# Altium PCB Signal Generator_PCB.PcbDoc
Units mm, origin at the board's own origin, x right, y up, seen from the top; angles counter-clockwise.
Board outline 152.4 x 101.6 mm, 2 copper layers (Top Layer, Bottom Layer); 53 components, 53 nets, 222 pads, 9 vias.
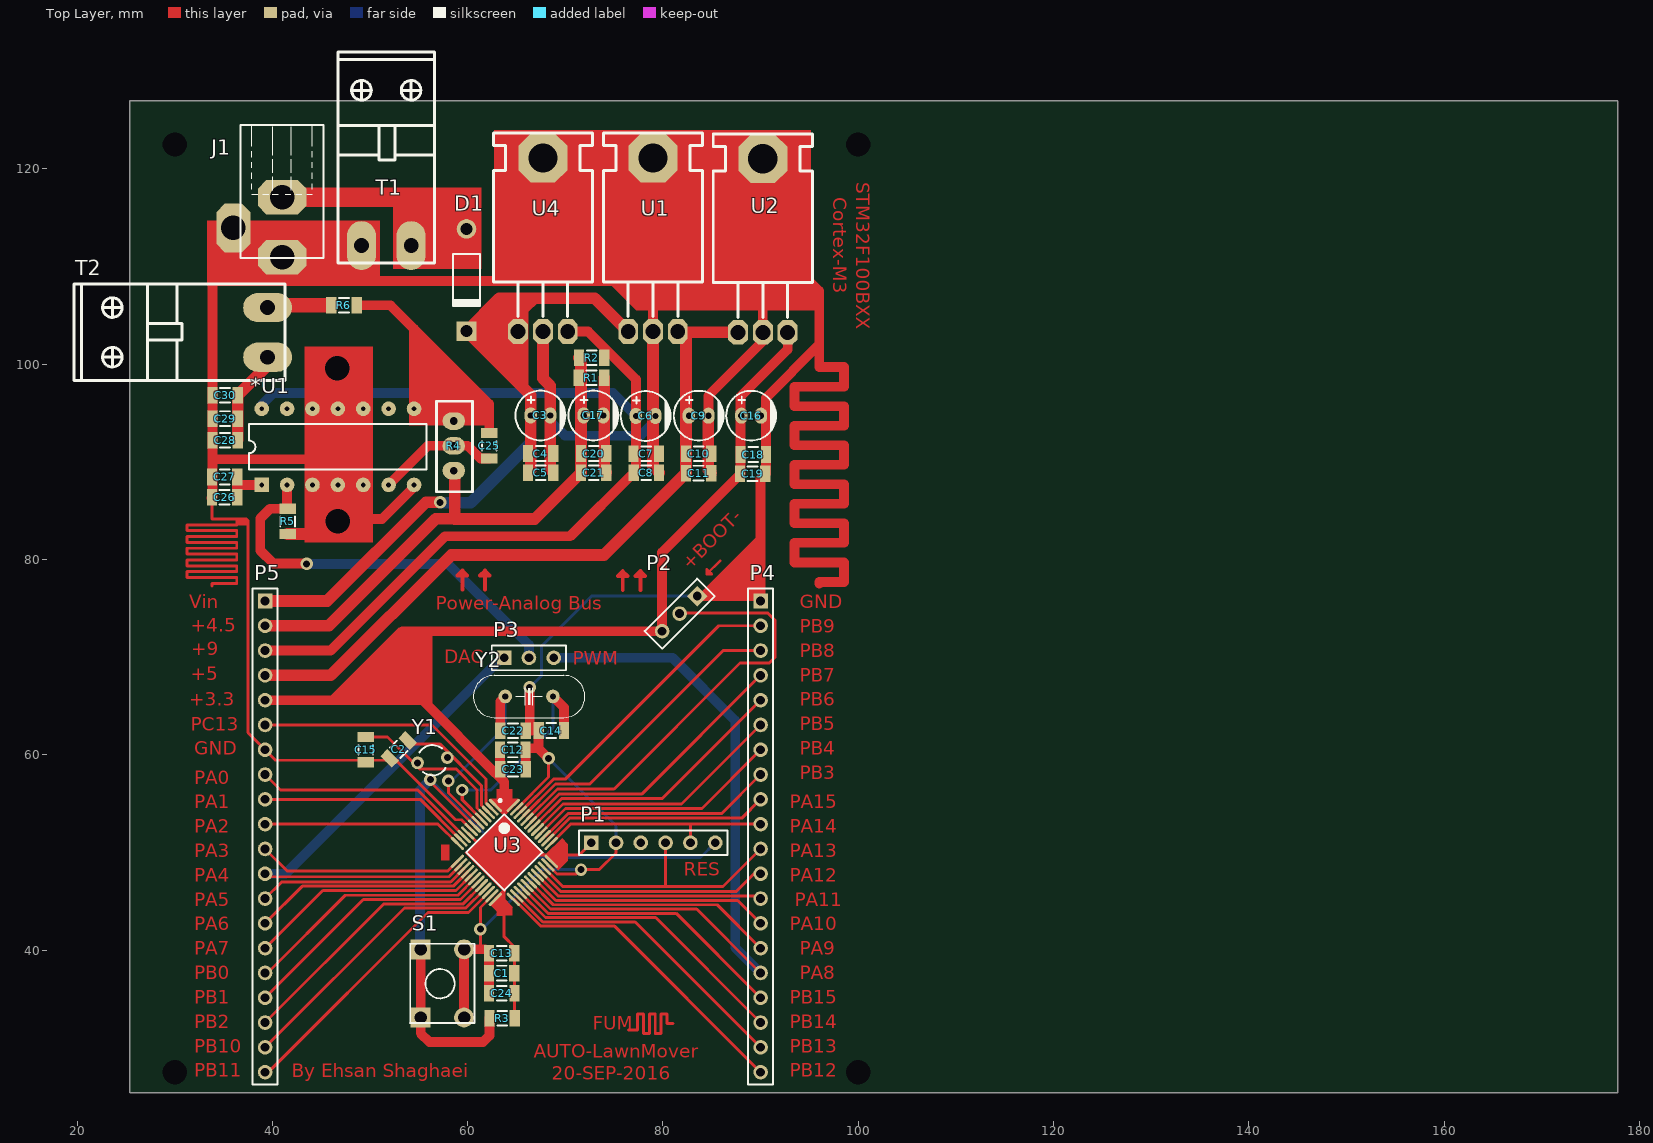
[diagram p0: Top Layer view]
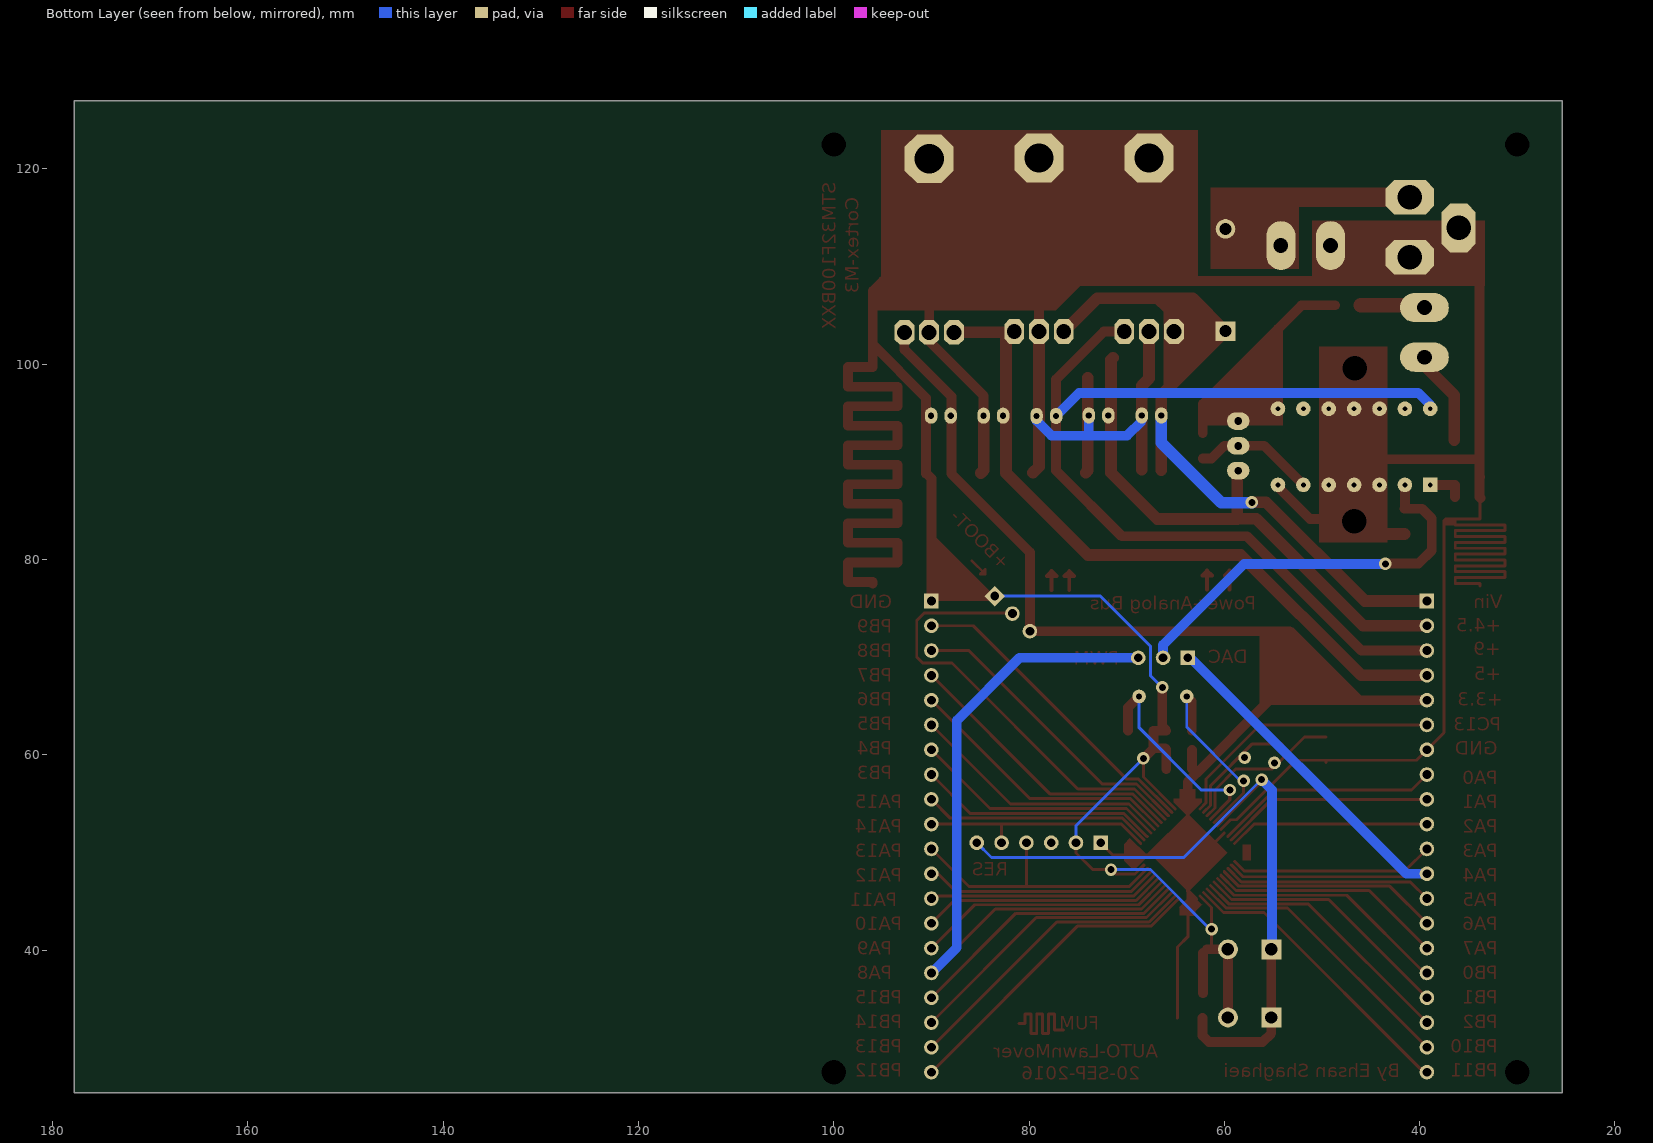
[diagram p1: Bottom Layer view, seen from below]
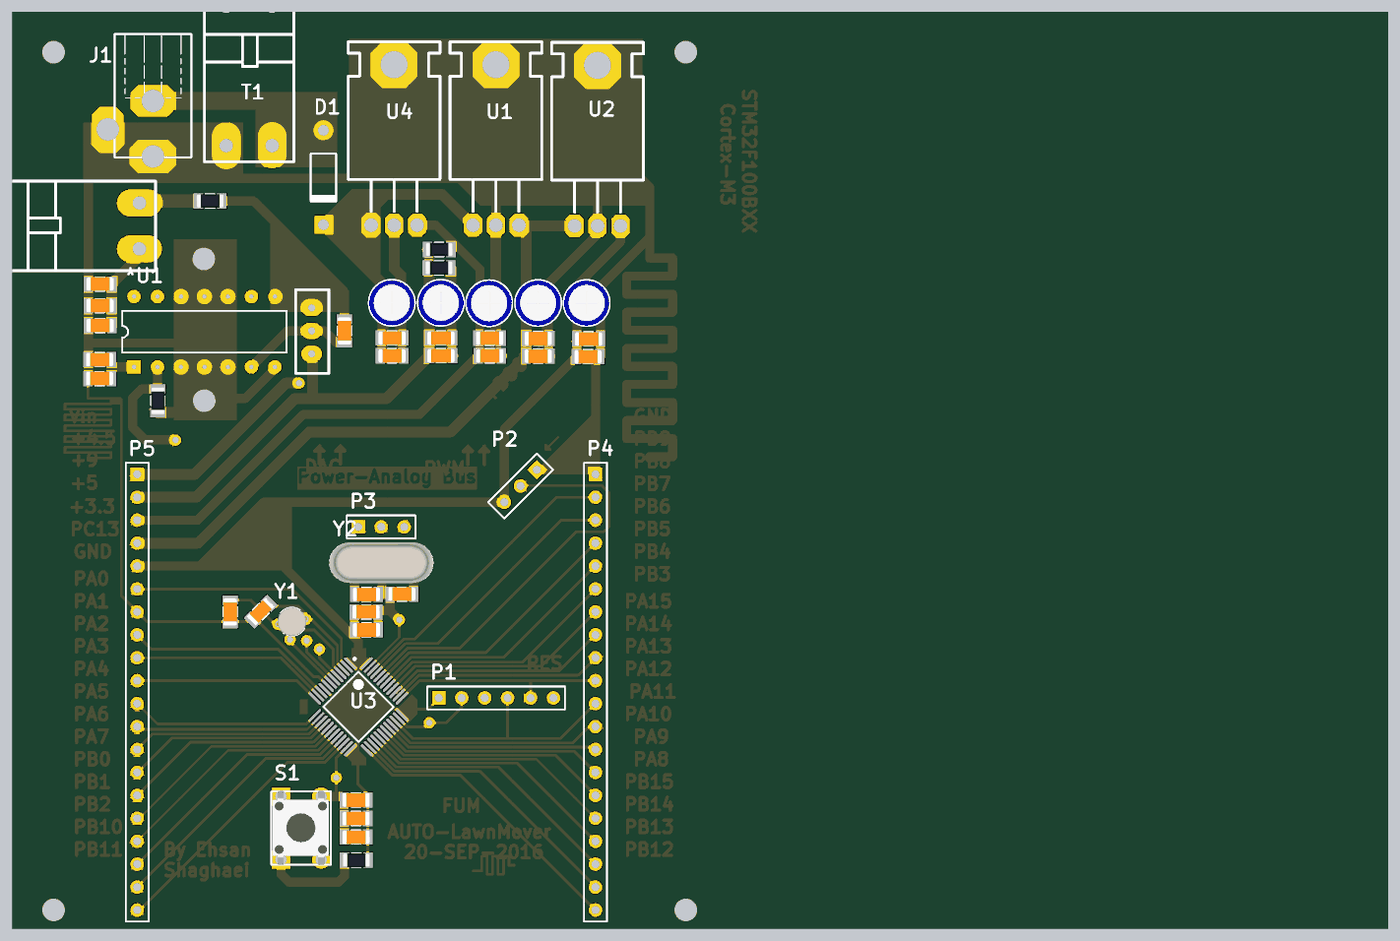
[diagram p2: 3D render of the assembled board from above, using the file's embedded part models]

## Layer stack, top to bottom
Top Solder: solder mask 0.0102, Solder Resist, Dk 3.5
Top Layer: signal copper 0.0356
Dielectric 1: dielectric 0.32, FR-4, Dk 4.8
Bottom Layer: signal copper 0.0356
Bottom Solder: solder mask 0.0102, Solder Resist, Dk 3.5

## Board outline
25.4,25.4 177.8,25.4 177.8,127 25.4,127

## Design rules (kind name [scope] priority, off if disabled: settings)
Clearance [All] p1: gap=0.14
PolygonConnect [All] p1: connectstyle=Relief reliefconductorwidth=0.254 reliefentries=4 polygonreliefangle="90 Angle" airgapwidth=0.254
RoutingVias [All] p1: holewidth=0.711 width=1.27 viastyle="Through Hole" minholewidth=0.711 minwidth=1.27 maxholewidth=0.711 maxwidth=1.27
SolderMaskExpansion [All] p1: expansion=0.102
Width [All] p1: maxlimit=2 minlimit=0.2 preferedwidth=0.5 checkconnectedcopper=TRUE
30 further rules are at their usual default settings.

## Components (designator, comment, footprint, x,y, rotation, side; value= is the part's Value field where it differs from the comment)
*U1 "*AMP" LM380N-DIP 38.9,87.638 r90 top
C1 "10uf" SMD_CAP_1206 62.181,37.636 r0 top
C2 "10pF" SMD_CAP_1206 53.848,61.468 r225 top
C3 "470U" "cap 01" 67.45,94.75 r180 top
C4 "100nF" SMD_CAP_1206 66.175,90.85 r0 top
C5 "10Uf" SMD_CAP_1206 66.175,88.875 r0 top
C6 "470U" "cap 01" 78.225,94.7 r180 top
C7 "100nF" SMD_CAP_1206 76.985,90.839 r0 top
C8 "10Uf" SMD_CAP_1206 77,88.875 r0 top
C9 "470U" "cap 01" 83.65,94.725 r180 top
C10 "100nF" SMD_CAP_1206 82.351,90.814 r0 top
C11 "10Uf" SMD_CAP_1206 82.35,88.85 r0 top
C12 "10Uf" SMD_CAP_1206 65.906,60.491 r180 top
C13 "100nF" SMD_CAP_1206 62.181,39.681 r0 top
C14 "20pF" SMD_CAP_1206 69.867,62.48 r180 top
C15 "10pF" SMD_CAP_1206 49.562,61.815 r270 top
C16 "470U" "cap 01" 89.025,94.725 r180 top
C17 "470U" "cap 01" 72.875,94.75 r180 top
C18 "100nF" SMD_CAP_1206 87.95,90.75 r0 top
C19 "10Uf" SMD_CAP_1206 87.875,88.775 r0 top
C20 "100nF" SMD_CAP_1206 71.604,90.85 r0 top
C21 "10Uf" SMD_CAP_1206 71.602,88.886 r0 top
C22 "20pF" SMD_CAP_1206 63.345,62.467 r0 top
C23 "100nF" SMD_CAP_1206 65.938,58.524 r180 top
C24 "10Uf" SMD_CAP_1206 62.189,35.573 r0 top
C25 "100nF" SMD_CAP_1206 62.2,90.35 r90 top
C26 "10Uf" SMD_CAP_1206 36.399,86.357 r180 top
C27 "100nF" SMD_CAP_1206 36.402,88.45 r180 top
C28 "100Uf" SMD_CAP_1206 36.45,92.225 r180 top
C29 "100nF" SMD_CAP_1206 36.447,94.428 r180 top
C30 "10Uf" SMD_CAP_1206 36.45,96.825 r180 top
D1 "Diode 1N4007" DO-41 59.875,108.625 r270 top
J1 "DC_Jack" My_DC_Jack 41,119.525 r180 top
P1 "ProgrammerSocket" HDR1X6 72.649,50.986 r0 top
P2 "Jumper" HDR1X3 83.5,76.25 r225 top
P3 "JUMPER" HDR1X3 63.733,69.925 r0 top
P4 "Header 20" HDR1X20 90,75.75 r270 top
P5 "Header 20" HDR1X20 39.25,75.75 r270 top
R1 "1K" "RES 1206 (3216X08L)" 73.975,98.625 r180 top
R2 "1K" "RES 1206 (3216X08L)" 71.4,100.65 r0 top
R3 "10K" "RES 1206 (3216X08L)" 62.225,33.025 r0 top
R4 "POT" MOL_1 58.575,94.175 r270 top
R5 "1K" "RES 1206 (3216X08L)" 41.55,82.6 r90 top
R6 "VAR" "RES 1206 (3216X08L)" 48.625,106.025 r180 top
S1 "Switch PB" "Switch - Push to On" 57.404,36.576 r90 top
T1 "PHONIX2" PHONIX2 54.2,112.15 r0 top
T2 "ANT" PHONIX2 39.5,105.8 r90 top
U1 "7805" My_TO-220 76.45,103.35 r0 top
U2 "lf33" My_TO-220 87.7,103.275 r0 top
U3 "STM32F100C8T6B" STM-LQFP48_N 63.75,50 r315 top
U4 "7809" My_TO-220 65.175,103.35 r0 top
Y1 "32khz" "XTAL RTC" 56.388,59.436 r100 top
Y2 "8 - 12 Mhz" "XTAL Small" 66.285,65.967 r0 top

## Footprints (in the part's own frame and the unit in brackets; to place one, negate y for a bottom-side part, rotate by r counter-clockwise, add the part's x,y. Pads: shape width x height; smd on the part's side, far side on the other; paste and mask are expansions set on the pad)
"cap 01" [mm]
  oval 1.27x1.651 hole 0.635: 1(1,0) 2(-1,0)
  silkscreen extent -2.55,-2.55 2.55,2.55, body extent -2.53,-2.53 2.53,2.53, height 12.54
DO-41 [mm] "Diode, Axial; Body 5.2 x 2.7 mm (LxDia. max), Lead Dia. 0.86 mm (max)"
  round 2 hole 1.2: 1(-5.23,0)
  rect 2x2 hole 1.2: 2(5.23,0)
  silkscreen extent -2.65,-1.4 2.75,1.4
HDR1X3 [mm] "Connector; Header; 3 Position"
  rect 1.5x1.5 hole 0.9: 1(0,0)
  round 1.5 hole 0.9: 2(2.54,0) 3(5.08,0)
  silkscreen extent -1.27,-1.27 6.35,1.27
HDR1X6 [mm] "Connector; Header; 6 Position"
  rect 1.5x1.5 hole 0.9: 1(0,0)
  round 1.5 hole 0.9: 2(2.54,0) 3(5.08,0) 4(7.62,0) 5(10.16,0) 6(12.7,0)
  silkscreen extent -1.27,-1.27 13.97,1.27
HDR1X20 [mm] "Connector; Header; 20 Position"
  rect 1.5x1.5 hole 0.9: 1(0,0)
  round 1.5 hole 0.9: 2(2.54,0) 3(5.08,0) 4(7.62,0) 5(10.16,0) 6(12.7,0) 7(15.24,0) 8(17.78,0) 9(20.32,0) 10(22.86,0) 11(25.4,0) 12(27.94,0) 13(30.48,0) 14(33.02,0) 15(35.56,0) 16(38.1,0) 17(40.64,0) 18(43.18,0) 19(45.72,0) 20(48.26,0)
  silkscreen extent -1.27,-1.27 49.53,1.27
LM380N-DIP [mm]
  rect 1.5x1.5 / inner rect 1.2x1.2 / far side rect 1.5x1.5 hole 0.5: 1(0,0)
  round 1.5 / inner round 1.2 / far side round 1.5 hole 0.5: 2(0,-2.6) 3(0,-5.2) 4(0,-7.8) 5(0,-10.4) 6(0,-13) 7(0,-15.6) 8(7.8,-15.6) 9(7.8,-13) 10(7.8,-10.4) 11(7.8,-7.8) 12(7.8,-5.2) 13(7.8,-2.6) 14(7.8,0)
  silkscreen extent 1.58,-16.9 6.22,1.3
MOL_1 [mm]
  oval 1.8x2.3 hole 0.8: 1(0,0) 2(2.54,0) 3(5.08,0)
  silkscreen extent -2.03,-1.78 7.24,1.91
My_DC_Jack [mm]
  oct 5x3.5 hole 2.5: 1(0,8.57) 3(0,2.42)
  oct 3.5x5 hole 2.5: 2(5,5.57)
  silkscreen extent -4.25,-4.98 4.25,8.67
My_TO-220 [mil]
  oct 196.85x196.85 hole 118.11: 0(99.49,699.49)
  oct 80x100 hole 60: 1(-0.5,-0.5) 2(99.5,-0.5) 3(199.5,-0.5)
  silkscreen extent -100,60 300,800
PHONIX2 [mm]
  oval 3x5 hole 1.5: 1(0,0) 2(-5.08,0)
  silkscreen extent -7.49,-1.78 2.41,19.81
"RES 1206 (3216X08L)" [mm] "Chip Resistor, 2-Leads, Body 3.2x1.6mm, IPC High Density _ (0.125 W)"
  rect 1.05x1.7 smd: 1(0,0) 2(2.596,0)
  silkscreen extent 0.8,-0.75 1.8,0.75, body extent -0.23,-0.76 2.82,0.76, height 0.6
SMD_CAP_1206 [mm]
  rect 1.05x1.7 smd: 1(0,0) 2(2.596,0)
  silkscreen extent 0.8,-0.75 1.8,0.75, body extent -0.22,-0.77 2.82,0.75, height 0.75
STM-LQFP48_N [mm] "QFP, 48-Leads, Body 7x7mm, Pitch 0.5mm, IPC Medium Density"
  oval 1.8x0.3 smd: 1(-4.05,2.75) 2(-4.05,2.25) 3(-4.05,1.75) 4(-4.05,1.25) 5(-4.05,0.75) 6(-4.05,0.25) 7(-4.05,-0.25) 8(-4.05,-0.75) 9(-4.05,-1.25) 10(-4.05,-1.75) 11(-4.05,-2.25) 12(-4.05,-2.75) 25(4.05,-2.75) 26(4.05,-2.25) 27(4.05,-1.75) 28(4.05,-1.25) 29(4.05,-0.75) 30(4.05,-0.25) 31(4.05,0.25) 32(4.05,0.75) 33(4.05,1.25) 34(4.05,1.75) 35(4.05,2.25) 36(4.05,2.75)
  oval 0.3x1.8 smd: 13(-2.75,-4.05) 14(-2.25,-4.05) 15(-1.75,-4.05) 16(-1.25,-4.05) 17(-0.75,-4.05) 18(-0.25,-4.05) 19(0.25,-4.05) 20(0.75,-4.05) 21(1.25,-4.05) 22(1.75,-4.05) 23(2.25,-4.05) 24(2.75,-4.05) 37(2.75,4.05) 38(2.25,4.05) 39(1.75,4.05) 40(1.25,4.05) 41(0.75,4.05) 42(0.25,4.05) 43(-0.25,4.05) 44(-0.75,4.05) 45(-1.25,4.05) 46(-1.75,4.05) 47(-2.25,4.05) 48(-2.75,4.05)
  silkscreen extent -4.17,-2.75 2.75,3.57, body extent -3.5,-3.5 3.5,3.5, height 1.6
"Switch - Push to On" [mil]
  rect 80x80 hole 50: 1(-137.5,87.5) 1(137.5,87.5)
  round 80 hole 50: 2(-137.5,-87.5) 2(137.5,-87.5)
  silkscreen extent -160,-130 160,130, body extent -155,-121 157,123, height 205
"XTAL RTC" [mm]
  round 1.3 hole 0.7: 1(0,1.55) 2(0,-1.55)
  silkscreen extent -1.55,-1.19 1.55,1.17, body extent -1.6,-1.73 1.6,1.72, height 8.98
"XTAL Small" [mil]
  round 55 hole 25: 1(-96.06,0) 2(96.06,0)
  silkscreen extent -225,-85 225,85, body extent -226,-89 226,89, height 140

## Part data
*U1: library part LM380N
C1 C2 C4 C5 C7 C8 C10 C11 C12 C13 C14 C15 C18 C19 C20 C21 C22 C23 C24 C25 C26 C27 C28 C29 C30: library part Cap-Bipolar, "Bipolar Capacitor"
C3 C6 C9 C16 C17: library part Cap-Polar, "Polar Capacitor"
D1: "1 Amp General Purpose Rectifier"
P1: library part "Header 6", "Header, 6-Pin"
P2 P3: library part "Header 3", "Header, 3-Pin"
P4 P5: "Header, 20-Pin"
R1 R2 R3 R5 R6: library part Resistor, "Resistor"
S1: "Push Button Switch"
T2: library part PHONIX2
U1: "Regulator"
U2 U4: library part 7805, "Regulator"
U3: "ARM Cortex-M3 32-bit MCU, 64 KB Flash, 8 KB Internal RAM, 37 I/Os, 48-pin LQFP, -40 to 85 degC, Tray"
Y1 Y2: library part XTAL, "XTAL Crystal"

## Free pads (board coordinates)
  oct 1.524x1.524 hole 2.5: 2(46.625,99.6) 3(46.675,83.9) 4(100,27.5) 5(100,122.5) 6(30,122.5) 7(30,27.5)

## Via types
v1: diameter 1.27, hole 0.711, Top Layer to Bottom Layer, 9 vias

## Nets (pads, with @x,y where several pads share a name; then routed paths per layer and width w, separated by ;. In a path a pad name is that pad's centre, name@x,y a point inside that pad or via, vN(x,y) a via of type N, cw(c..) or ccw(c..) an arc to the next point about the centre after c; other vN are vias at no path point)
+3.3: C1.2 C12.2 C13.2 C16.1 C18.1 C19.1 C23.2 C24.2 P1.1 P2.3 P5.5 R3.2 U2.3 U3.1 U3.9 U3.24 U3.36 U3.48 | length 144.1
  Top Layer w0.3: U3.9 62.232,49.75 71.457,49.75 P1.1@72.606,50.899 ; U3.24 63.75,46.111 63.75,54.808 ; U3.1 63.75,54.808 ; 63.75,46.006 63.699,45.955 63.699,41.402 64.785,40.316 C24.2 64.785,33.061 R3.2 ; U3.48 63.75,54.808
  Top Layer w1: P5.5 46.228,65.59 ; C23.2@62.853,58.098 55.36,65.59 46.228,65.59 ; C23.2@62.884,58.066 63.75,57.2 63.75,54.808 ; C23.2@63.31,58.555 C12.2 ; U2.3 92.767,101.517 87.95,96.7 C18.1 87.95,88.775 79.908,80.733 P2.3 53.296,72.658 46.228,65.59
+4.5: C17.1 C20.1 C21.1 P5.2 R1.2 R2.1 R4.3 | length 55.7
  Top Layer w1.2: P5.2 45.785,73.21 56.731,84.156 58.664,84.156 ; R4.3 58.664,89.006 58.664,84.143 66.859,84.143 C21.1 71.602,100.448 R2.1
+5: C9.1 C10.1 C11.1 P5.4 U1.3 U2.1 | length 72.5
  Top Layer w1.2: P5.4 45.98,68.13 58.3,80.45 73.95,80.45 C11.1 82.35,102.505 81.592,103.262 U2.1
+9: *U1.14 C6.1 C7.1 C8.1 P5.3 R2.2 U4.3 | length 104.2
  Top Layer w1: P5.3 45.97,70.67 57.675,82.375 70.5,82.375 C8.1 77.225,89.1 C6.1 77.225,98.45 72.338,103.337 U4.3
  Bottom Layer w1: *U1.14 38.9,95.825 40.125,97.05 74.875,97.05 C6.1
A0: P5.8 U3.10 | length 23
  Top Layer w0.3: P5.8 40.832,56.388 54.887,56.388 U3.10
A1: P5.9 U3.11 | length 21.8
  Top Layer w0.3: P5.9 55.138,55.43 U3.11
A2: P5.10 U3.12 | length 20.5
  Top Layer w0.3: P5.10 56.971,52.89 U3.12
A3: P5.11 U3.13 | length 21
  Top Layer w0.3: P5.11 41.49,48.11 57.971,48.11 U3.13
A4: P3.1 P5.12 U3.14 | length 54.3
  Top Layer w0.3: P5.12 39.554,47.506 58.074,47.506 U3.14
  Bottom Layer w1: P5.12 41.348,47.81 63.463,69.925 P3.1
A5: P5.13 U3.15 | length 21.7
  Top Layer w0.3: P5.13 40.957,46.977 58.252,46.977 U3.15
A6: P5.14 U3.16 | length 22.9
  Top Layer w0.3: P5.14 43.057,46.537 58.519,46.537 U3.16
A7: P5.15 U3.17 | length 24.2
  Top Layer w0.3: P5.15 45.157,46.097 58.786,46.097 U3.17
A8: P3.3 P4.16 U3.29 | length 75.8
  Top Layer w0.3: U3.29 68.491,44.198 83.452,44.198 P4.16
  Bottom Layer w1: P3.3 81,69.925 87.398,63.527 87.398,40.252 P4.16
A9: P4.15 U3.30 | length 26.4
  Top Layer w0.3: U3.30 68.758,44.638 85.552,44.638 P4.15
A10: P4.14 U3.31 | length 25.1
  Top Layer w0.3: U3.31 69.025,45.078 87.652,45.078 P4.14
A11: P4.13 U3.32 | length 23.8
  Top Layer w0.3: U3.32 69.259,45.552 89.718,45.552 P4.13
A12: P4.12 U3.33 | length 24.1
  Top Layer w0.3: U3.33 69.518,46 87.5,46 89.31,47.81 P4.12
A13: P1.4 P4.11 U3.34 | length 28.9
  Top Layer w0.3: U3.34 69.725,46.5 86.15,46.5 P4.11 ; 80.269,46.595 P1.4
A14: P1.5 P4.10 U3.37 | length 24.1
  Top Layer w0.3: U3.37 70.529,52.89 P4.10 ; P1.5 82.809,52.858
A15: P4.9 U3.38 | length 23.5
  Top Layer w0.3: U3.38 70.432,53.5 88.07,53.5 P4.9
ANT-IN: R6.2 T2.1 | length 4.4
  Top Layer w1.5: T2.1@41.675,105.975 41.725,106.025 R6.2
ANT-OUT: C28.1 C29.1 C30.1 T2.2 | length 9.9
  Top Layer w1.2: C28.1 C30.1 39.5,99.875 T2.2@39.5,100.895
B0: P5.16 U3.18 | length 25.5
  Top Layer w0.3: P5.16 39.502,37.65 47.464,45.612 59.008,45.612 U3.18
B1: P5.17 U3.19 | length 26.7
  Top Layer w0.3: P5.17 49.312,45.172 59.275,45.172 U3.19
B2: P5.18 U3.20 | length 28
  Top Layer w0.3: P5.18 51.412,44.732 59.542,44.732 U3.20
B3: P4.8 U3.39 | length 24.8
  Top Layer w0.3: U3.39 67.936,51.626 70.31,54 86.03,54 P4.8
B4: P4.7 U3.40 | length 26
  Top Layer w0.3: U3.40 70.018,54.5 83.99,54.5 P4.7
B5: P4.6 U3.41 | length 27.3
  Top Layer w0.3: U3.41 69.751,54.94 81.89,54.94 P4.6
B6: P4.5 U3.42 | length 28.6
  Top Layer w0.3: U3.42 69.604,55.5 79.91,55.5 P4.5
B7: P4.4 U3.43 | length 29.8
  Top Layer w0.3: U3.43 69.396,56 77.87,56 P4.4
B8: P4.3 U3.45 | length 31.3
  Top Layer w0.3: U3.45 68.982,57 72.5,57 86.17,70.67 P4.3
B9: P4.2 U3.46 | length 32.5
  Top Layer w0.3: U3.46 68.775,57.5 ; 68.86,57.5 70,57.5 85.71,73.21 P4.2
B10: P5.19 U3.21 | length 29.4
  Top Layer w0.3: P5.19@39.379,29.901 P5.19 53.512,44.292 59.81,44.292 U3.21
B11: P5.20 U3.22 | length 30.5
  Top Layer w0.3: P5.20 39.562,27.49 55.923,43.852 60.077,43.852 U3.22
B12: P4.20 U3.25 | length 32.7
  Top Layer w0.3: U3.25 64.754,45.192 67.507,42.438 75.052,42.438 P4.20
B13: P4.19 U3.26 | length 31.4
  Top Layer w0.3: U3.26 67.69,42.878 77.152,42.878 P4.19
B14: P4.18 U3.27 | length 30.1
  Top Layer w0.3: U3.27 67.957,43.318 79.252,43.318 P4.18
B15: P4.17 U3.28 | length 28.9
  Top Layer w0.3: U3.28 68.224,43.758 81.352,43.758 P4.17
BOOT: P2.2 U3.44 | length 46.2
  Top Layer w0.3: U3.44 69.189,56.5 75,56.5 87.892,69.392 90.892,69.392 91.5,70 91.5,73.75 90.75,74.5 P2.2@81.704,74.5
BYPASS: *U1.1 C26.1 C27.1 | length 3.6
  Top Layer w1: C26.1@36.363,86.393 36.363,87.438 ; C27.1@36.363,87.638 *U1.1
C13: P5.6 U3.2 | length 28.2
  Top Layer w0.3: P5.6 56.33,63.05 61.86,57.52 61.86,55.072 U3.2
FEEDBACK: *U1.6 C25.1 R4.2 | length 12.5
  Top Layer w1: *U1.6 55.897,91.635 R4.2 60.015,91.635 61.3,90.35 C25.1
GROUND: *U1.3 *U1.4 *U1.5 *U1.7 *U1.10 *U1.11 *U1.12 C1.1 C2.2 C3.2 C4.2 C5.2 C6.2 C7.2 C8.2 C9.2 C10.2 C11.2 C12.1 C13.1 C14.2 C15.2 C16.2 C17.2 C18.2 C19.2 C20.2 C21.2 C22.2 C23.1 C24.1 C26.2 C27.2 C28.2 C29.2 C30.2 J1.1 J1.2 P1.2 P2.1 P4.1 P5.7 pad.2 pad.3 R1.1 R5.1 S1.2 T1.2 U1.2 U2.2 U3.8 U3.23 U3.35 U3.47 U4.2 | length 527.1
  Top Layer w0.3: 33.803,77.287 33.803,77.55 36.343,77.55 36.343,78.15 31.263,78.15 31.263,78.75 36.343,78.75 36.343,79.35 31.263,79.35 31.263,79.95 36.343,79.95 36.343,80.55 31.263,80.55 31.263,81.15 36.343,81.15 36.343,81.75 31.263,81.75 31.263,82.35 36.343,82.35 36.343,82.95 31.263,82.95 31.263,83.55 36.343,83.55 36.343,84.15 ; C26.2 33.803,84.15 37.35,84.15 37.5,84 37.5,62.26 P5.7 40.324,59.436 C15.2@49.562,59.436 ; C15.2 C15.2@49.562,59.436 ; C2.2@52.274,59.284 C2.2@52.426,59.436 ; C2.2@52.664,59.436 58.76,53.34 59.349,53.34 U3.8 ; C2.2@52.832,59.436 C15.2@49.562,59.436 ; 61.3,40.069 v1(61.3,42.143) 61.3,44.368 U3.23 ; U3.47 68.281,57.713 v1(68.281,59.635) ; U3.35 69.156,47.776 71.142,47.776 v1(71.601,48.235) 73.474,48.235 75.189,49.949 P1.2
  Top Layer w1: C26.2@33.75,86.304 C26.2 ; C27.2@33.803,88.447 C27.2 ; C26.2@33.854,86.408 33.854,90.275 ; J1.2 33.854,111.809 C30.2 C28.2 33.854,90.275 ; 43.775,90.275 33.854,90.275 ; T1.2@47.85,111.175 50.5,108.525 94.975,108.525 96,107.5 96,102 ; *U1.5@49.55,87.388 49.55,84.15 51.225,84.15 54.5,87.425 *U1.7 ; S1.2@59.627,33.084 59.627,40.069 61.3,40.069 C13.1@61.794,40.069 ; C1.1 C13.1 ; C24.1 C1.1@62.189,37.627 ; C23.1 65.938,60.523 66.073,60.658 67.258,60.658 ; v1(66.35,66.9) 66.35,62.877 C22.2 67.258,62.467 67.258,60.658 ; v1(68.281,59.635) 67.258,60.658 ; U1.2 78.977,108.525 ; P2.1 P4.1@89.5,76.25 ; C9.2 84.65,96.775 90.227,102.352 U2.2 90.227,108.25 ; P4.1 90,88.304 C19.2 ; C19.2@90.546,88.775 C18.2 90.546,96.546 96,102 ; 96,77.54 96,77.7 98.54,77.7 98.54,79.7 93.46,79.7 93.46,81.7 98.54,81.7 98.54,83.7 93.46,83.7 93.46,85.7 98.54,85.7 98.54,87.7 93.46,87.7 93.46,89.7 98.54,89.7 98.54,91.7 93.46,91.7 93.46,93.7 98.54,93.7 98.54,95.7 93.46,95.7 93.46,97.7 98.54,97.7 98.54,99.7 96,99.7 96,102
  Top Layer w1.2: R5.1 44.4,82.6 ; U4.2 67.702,98.548 68.45,97.8 C3.2 C5.2@68.45,89.196 ; R1.1 73.975,89.109 C21.2 ; U1.2 78.977,89.494 C8.2 ; C9.2 84.65,89.146 C11.2
  Top Layer w2: J1.2 39,110.955 J1.1 47.925,110.955 T1.2
  Bottom Layer w0.3: v1(61.3,42.143) 61.38,42.063 67.553,48.235 v1(71.601,48.235) ; v1(66.35,66.9) 67.575,68.125 67.575,71.125 72.7,76.25 P2.1 ; v1(68.281,59.635) 75.189,52.727 P1.2
  Bottom Layer w1: C3.2 68.45,94.2 69.975,92.675 73.8,92.675 ; C17.2 73.875,92.75 73.8,92.675 ; C6.2@79.25,94.225 77.7,92.675 73.8,92.675
INPUTVOLTAGE: C3.1 C4.1 C5.1 D1.2 P5.1 U1.1 U4.1 | length 78.4
  Top Layer w1.2: P5.1 45.625,75.75 55.725,85.85 v1(57.175,85.85) ; U4.1 D1.2@59.933,103.337 ; C5.1@66.45,89.15 C3.1 66.45,96.82 D1.2@59.933,103.337 ; U1.1 73.025,106.75 63.23,106.75 D1.2 D1.2@59.933,103.337
  Bottom Layer w1.2: v1(57.175,85.85) 57.125,85.8 60.3,85.8 66.45,91.95 C3.1
NetC2_1: C2.1 U3.3 Y1.2 | length 12.1
  Top Layer w0.3: C2.1@54.109,61.119 57.13,61.119 61.42,56.829 61.42,54.804 U3.3
NetC14_1: C14.1 U3.5 Y2.2 | length 22.9
  Top Layer w0.33: v1(59.436,56.388) 59.436,55.372 61.414,53.394 U3.5
  Top Layer w1: Y2.2 69.867,64.826 C14.1
  Bottom Layer w0.33: v1(59.436,56.388) 62.363,56.388 68.725,62.75 Y2.2
NetC15_1: C15.1 U3.4 Y1.1 | length 16.6
  Top Layer w0.3: C15.1 51.792,61.815 55.082,58.525 58.823,58.525 60.96,56.388 60.96,54.558 U3.4
NetC22_1: C22.1 U3.6 Y2.1 | length 20.6
  Top Layer w0.3: v1(58.025,57.325) 58.025,56.079 U3.6
  Top Layer w1: C22.1 63.345,65.467 Y2.1
  Bottom Layer w0.3: v1(58.025,57.325) 58.106,57.325 58.224,57.208 63.845,62.829 Y2.1
NetD1_1: D1.1 J1.3 T1.1 | length 20.2
  Top Layer w2: J1.3 56.625,117.105 D1.1
NRST: P1.6 R3.1 S1.1 U3.7 | length 75.6
  Top Layer w0.3: v1(56.175,57.45) 56.175,57.221 U3.7
  Top Layer w1: S1.1@55.181,40.069 55.181,33.084 55.181,31.469 56.075,30.575 61.575,30.575 62.225,31.225 R3.1
  Bottom Layer w0.3: v1(56.175,57.45) 64.15,49.475 83.838,49.475 P1.6
  Bottom Layer w1: S1.1@55.1,40.15 55.1,56.375 v1(56.175,57.45)
"PATTERN INPUT": *U1.2 P3.2 R5.2 | length 41.7
  Top Layer w1: R5.2@41.5,85.246 *U1.2 ; R5.2 39.746,85.196 38.75,84.2 38.75,80.925 40.099,79.576 43.471,79.576 v1(43.503,79.544)
  Bottom Layer w1: v1(43.503,79.544) 57.989,79.544 66.273,71.26 P3.2
SIGNALPATTERN: *U1.8 C25.2 R4.1 R6.1 | length 33.5
  Top Layer w1: R6.1 52.1,106.025 54.5,103.625 ; *U1.8 54.5,103.625 ; R4.1 58.575,98.75 ; C25.2 62.2,95.925 54.5,103.625
SWO: P1.3
pads on no net: *U1.9 *U1.13 U1.0 U2.0 U4.0
copper on no net: | length 36.9
  Top Layer w0.254: 84.901,78.584 85.004,78.481 84.477,78.481 ; 85.853,79.857 84.477,78.481 ; 84.477,78.481 84.565,78.569 84.921,78.569 84.477,79.013 84.477,78.481
  Top Layer w0.3: 76.474,31.826 77.411,31.826 77.411,32.462 77.411,33.462 78.011,33.462 78.011,31.462 78.611,31.462 78.611,33.462 79.211,33.462 79.211,31.462 79.811,31.462 79.811,33.462 80.411,33.462 80.411,32.462 81.004,32.462
  Top Layer w0.4: 59.43,78.828 58.939,78.338 59.92,78.338 59.446,78.812 59.446,78.86 ; 59.446,76.914 59.446,78.892 ; 61.741,78.828 61.251,78.338 62.231,78.338 61.757,78.812 61.757,78.86 ; 61.757,76.914 61.757,78.892 ; 75.865,78.777 75.375,78.286 76.356,78.286 75.881,78.761 75.881,78.809 ; 75.881,76.862 75.881,78.84 ; 77.663,78.777 77.173,78.286 78.154,78.286 77.679,78.761 77.679,78.809 ; 77.679,76.862 77.679,78.84

## Other copper
Top Layer:
  rectangle net GROUND: 36.343,83.5 37.35,84.15
  region net +3.3: 63.695,45.93 67.762,49.996 63.742,54.016 59.675,49.949
  region net +3.3: 64.601,43.522 64.601,44.402 62.965,44.402 62.965,43.522
  region net +3.3: 64.608,55.428 64.608,56.485 62.971,56.485 62.971,55.428
  rectangle: 57.258,49.179 58.138,50.816
  rectangle net +3.3: 69.386,49.165 70.266,50.802
  rectangle net GROUND: 33.3,108.025 51,114.7
  rectangle net GROUND: 43.3,81.75 50.275,101.8
  rectangle net GROUND: 62.7,109 95.175,124
  rectangle net NetD1_1: 52.35,109.725 61.4,118.1
  region net +3.3: 56.388,72.658 56.388,65.024 53.282,65.59 46.228,65.59 53.296,72.658
  region net +3.3: 67.762,49.996 67.975,49.783 67.32,49.783 67.514,49.977 67.722,49.977
  region net +3.3: 62.278,44.625 62.307,44.625 63.071,43.861 63.071,45.244 62.903,45.244 62.295,44.636
  region net +3.3: 63.564,45.691 63.564,45.439 64.601,44.402 63.721,43.522 62.965,43.522 62.965,45.223 62.926,45.262 63.62,45.955 63.699,45.955
  region net +3.3: 65.178,55.467 65.165,55.48 62.3,55.48 62.3,55.13 63.75,53.681 65.192,55.123 65.192,55.48
  region net +3.3: 69.659,51.427 67.964,49.732 67.964,49.445 70.266,49.445 70.266,50.82
  region net +3.3: 69.559,48.474 70.252,49.167 70.252,49.445 69.102,49.445 68.962,49.584
  region net +3.3: 69.559,49.683 69.559,48.474 69.263,48.179 67.639,49.803 69.559,49.803 69.619,49.862
  region net GROUND: 83.5,76.25 90.318,83.068 90.323,83.068 90.323,76.158 90.054,75.89 89.694,76.25
  region net GROUND: 74.525,108.25 77.25,105.525 96,105.525 96,107.5 94.475,108.725 74.6,108.725
  region net SIGNALPATTERN: 54,103.875 62.05,95.825 62.05,95.7 61.875,95.525 61.875,93.75 54.75,93.75 54.625,93.75 54,93.75
  region net INPUTVOLTAGE: 66.225,105.35 67.225,106.35 65.925,106.35 65.925,104.975 65.775,104.825
  region net INPUTVOLTAGE: 66.175,106.555 66.175,96.825 59.933,103.067 59.933,103.337 60.012,103.337 63.775,107.1 64.125,106.75 65.1,106.75
  text "STM32F100BXX" at 99.811,118.644 h1.4 r270
  text "Cortex-M3" at 97.426,117.077 h1.4 r270
  text "+BOOT-" at 82.718,78.844 h1.4 r45
  text "Vin" at 31.5,75 h1.4
  text "GND" at 94,75 h1.4
  text "Power-Analog Bus" at 56.729,74.839 h1.4
  text "+4.5" at 31.65,72.6 h1.4
  text "PB9" at 94,72.5 h1.4
  text "+9" at 31.675,70.175 h1.4
  text "PB8" at 94,70 h1.4
  text "DAC" at 57.59,69.395 h1.4
  text "PWM" at 70.778,69.203 h1.4
  text "+5" at 31.65,67.625 h1.4
  text "PB7" at 94,67.5 h1.4
  text "+3.3" at 31.5,65 h1.4
  text "PB6" at 94,65 h1.4
  text "PB5" at 94,62.5 h1.4
  text "PC13" at 31.625,62.475 h1.4
  text "GND" at 32,60 h1.4
  text "PB4" at 94,60 h1.4
  text "PB3" at 94,57.5 h1.4
  text "PA0" at 32,57 h1.4
  text "PA1" at 32,54.5 h1.4
  text "PA15" at 93,54.5 h1.4
  text "PA2" at 32,52 h1.4
  text "PA14" at 93,52 h1.4
  text "PA3" at 32,49.5 h1.4
  text "PA13" at 93,49.5 h1.4
  text "RES" at 82.133,47.627 h1.4
  text "PA4" at 32,47 h1.4
  text "PA12" at 93,47 h1.4
  text "PA5" at 32,44.5 h1.4
  text "PA11" at 93.5,44.5 h1.4
  text "PA6" at 32,42 h1.4
  text "PA10" at 93,42 h1.4
  text "PA7" at 32,39.5 h1.4
  text "PA9" at 94,39.5 h1.4
  text "PB0" at 32,37 h1.4
  text "PA8" at 94,37 h1.4
  text "PB1" at 32,34.5 h1.4
  text "PB15" at 93,34.5 h1.4
  text "PB2" at 32,32 h1.4
  text "PB14" at 93,32 h1.4
  text "FUM" at 72.799,31.852 h1.4
  text "PB10" at 32,29.5 h1.4
  text "PB13" at 93,29.5 h1.4
  text "AUTO-LawnMover" at 66.788,28.97 h1.4
  text "PB11" at 32,27 h1.4
  text "PB12" at 93,27 h1.4
  text "By Ehsan Shaghaei" at 41.963,26.982 h1.4
  text "20-SEP-2016" at 68.595,26.721 h1.4

## Silkscreen, mask and mechanical layers (free items; w line width, h text height)
Mechanical 1:
  lines w0.5: 94,125 102.5,125 102.5,25.5 27.5,25.5 27.5,125 95,125